# Altium PCB BC28转接板脚位图.PcbDoc
Units mil, origin at the board's own origin, x right, y up, seen from the top; angles counter-clockwise.
Board outline 6000 x 4000 mil, 2 copper layers (Top Layer, Bottom Layer); 2 components, 33 nets, 12 pads, 0 vias.
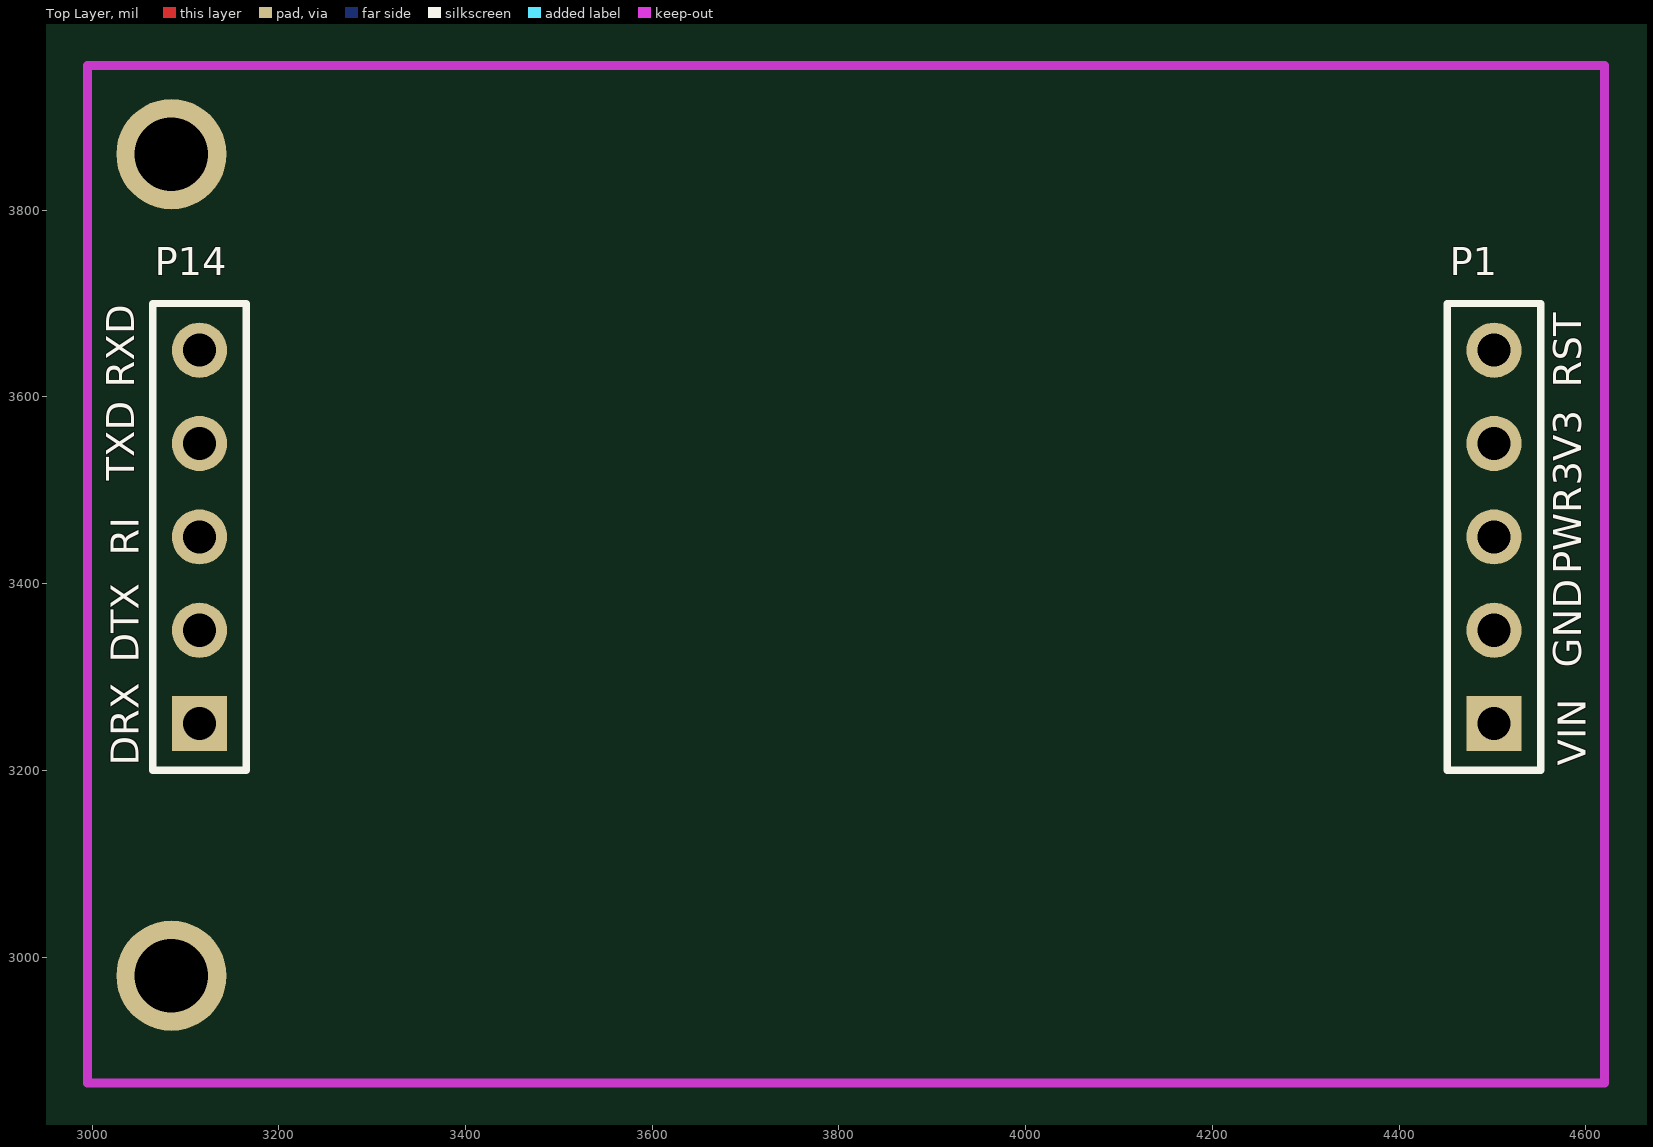
[diagram p0: Top Layer view]
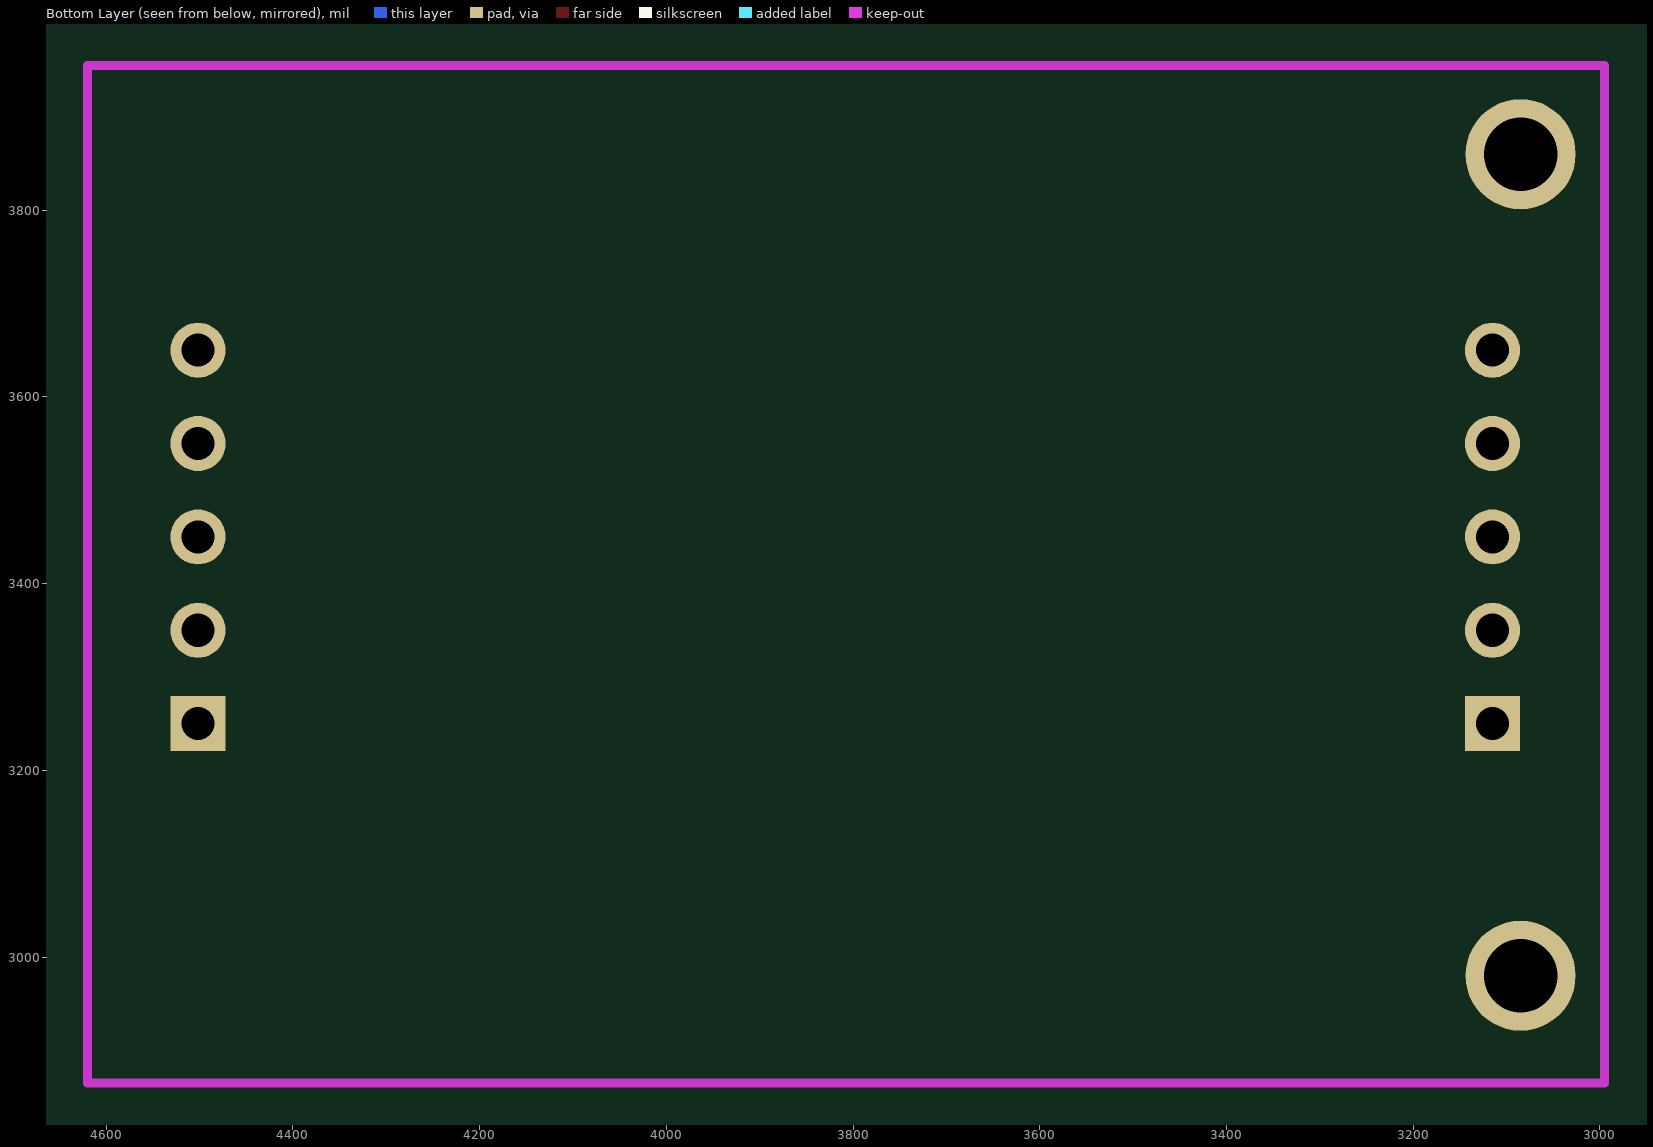
[diagram p1: Bottom Layer view, seen from below]

## Layer stack, top to bottom
Top Layer: signal copper 1.4
Dielectric: dielectric 12.6, FR-4, Dk 4.8
Bottom Layer: signal copper 1.4

## Board outline
1000,1000 7000,1000 7000,5000 1000,5000

## Design rules (kind name [scope] priority, off if disabled: settings)
Clearance [All] p1: gap=5.91
PlaneConnect [All] p1: planeconnectstyle=Direct reliefexpansion=20 reliefentries=4 reliefconductorwidth=10 reliefairgap=10
PolygonConnect [All] p1: connectstyle=Direct reliefconductorwidth=10 reliefentries=4 polygonreliefangle="90 Angle"
RoutingVias [All] p1: holewidth=28 width=50 viastyle="Through Hole" minholewidth=28 minwidth=50 maxholewidth=28 maxwidth=50
SilkscreenOverComponentPads [All] p1: minsilkscreentomaskgap=10
SolderMaskExpansion [All] p1: expansion=4
Width [All] p1: maxlimit=100 minlimit=10 preferedwidth=10 minimp=50.000000 maximp=50.000000 favimp=50.000000
26 further rules are at their usual default settings.

## Components (designator, comment, footprint, x,y, rotation, side; value= is the part's Value field where it differs from the comment)
P1 "电源接口" HDR1X5 4501.59,3250 r90 top
P14 "串口对外接口" HDR1X5 3115,3250 r90 top

## Footprints (in the part's own frame and the unit in brackets; to place one, negate y for a bottom-side part, rotate by r counter-clockwise, add the part's x,y. Pads: shape width x height; smd on the part's side, far side on the other; paste and mask are expansions set on the pad)
HDR1X5 [mm] "Connector; Header; 5 Position"
  rect 1.5x1.5 hole 0.9: 1(0,0)
  round 1.5 hole 0.9: 2(2.54,0) 3(5.08,0) 4(7.62,0) 5(10.16,0)
  silkscreen extent -1.27,-1.27 11.43,1.27

## Part data
P1 P14: library part "Header 5", "Header, 5-Pin"

## Free pads (board coordinates)
  round 118.11 hole 78.74: 0(3085,3860) 1(3085,2980)

## Nets (pads, with @x,y where several pads share a name; then routed paths per layer and width w, separated by ;. In a path a pad name is that pad's centre, name@x,y a point inside that pad or via, vN(x,y) a via of type N, cw(c..) or ccw(c..) an arc to the next point about the centre after c; other vN are vias at no path point)
3V3: P1.4
BC28_RX: 
BC28_TX: 
DRX: P14.1
DTX: P14.2
GND: P1.2
NetC27_2: 
NetC28_2: 
NetC31_2: 
NetD1_1: 
NetJ2_1: 
NetQ1_2: 
NetQ2_2: 
NetR27_1: 
NetR28_1: 
NetR34_1: 
PWR: P1.3
PWRKEY: 
RESET: 
RI: 
RI_E: P14.3
RST: P1.5
RXD: P14.5
RXD_DBG: 
SIM_CLK: 
SIM_DATA: 
SIM_GND: 
SIM_RST: 
SIM_VCC: 
TXD: P14.4
TXD_DBG: 
VCC: P1.1
VDD_EXT: 

## Keep-outs
Keep-Out Layer:
  lines w10: 2995,2865 4620,2865 4620,3955 2995,3955 2995,2865

## Silkscreen, mask and mechanical layers (free items; w line width, h text height)
Top Overlay:
  text "RXD" at 3045,3610 h30 r90
  text "RST" at 4595,3610 h30 r90
  text "TXD" at 3045,3510 h30 r90
  text "3V3" at 4595,3505 h30 r90
  text "RI" at 3050,3430 h30 r90
  text "PWR" at 4595,3410 h30 r90
  text "DTX" at 3050,3315 h30 r90
  text "GND" at 4595,3310 h30 r90
  text "DRX" at 3050,3205 h30 r90
  text "VIN" at 4600,3205 h30 r90